# EAGLE board Small Mosfet (EAGLE 6.4)
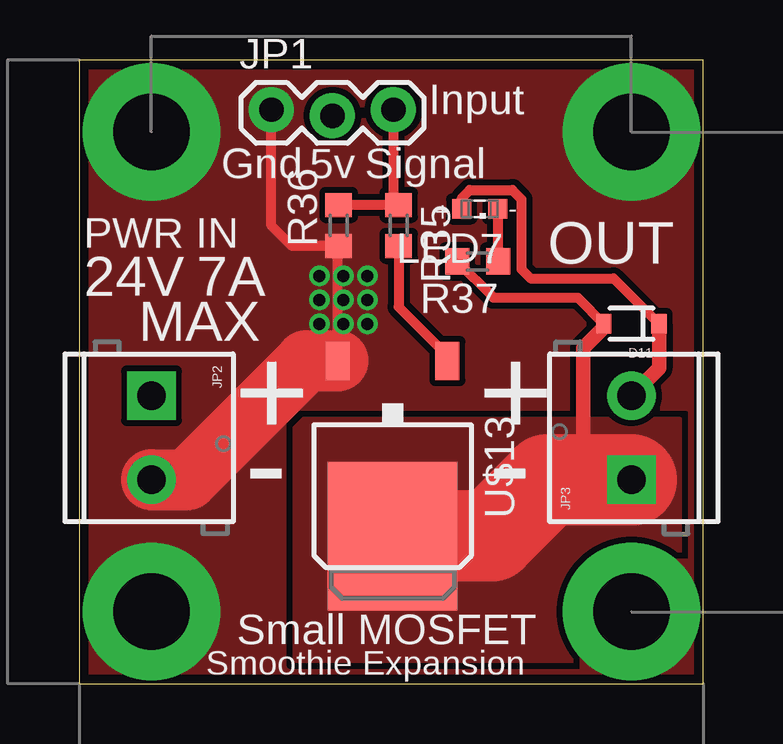
[diagram p0: board, top side]
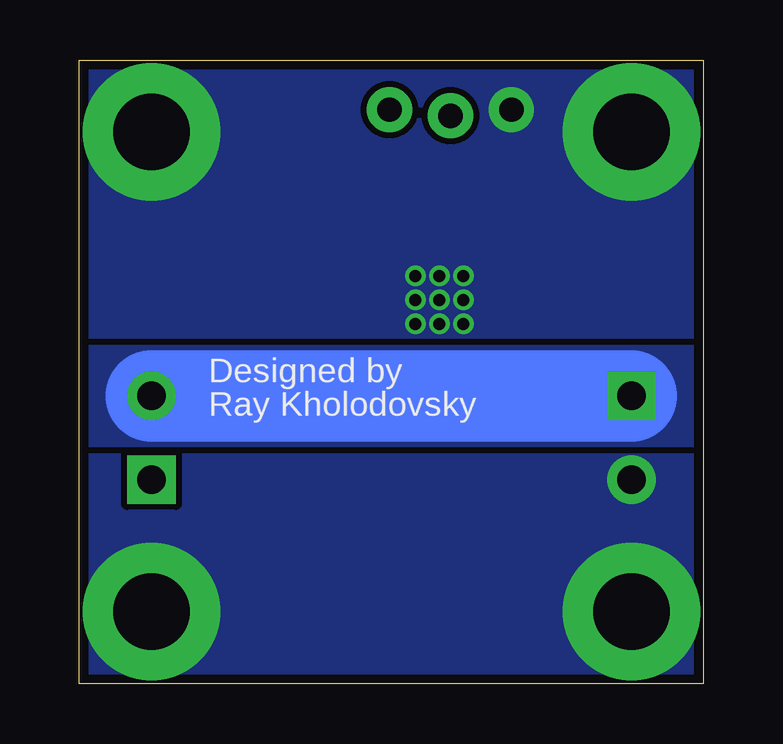
[diagram p1: board, bottom side, seen from below]

Size 26 x 26 mm. Coordinates in mm from the lower left corner, seen from the top.
Outline: 0,0 26,0 26,26 0,26 0,0
Copper layers (1*16): Top 0.0356mm / dielectric 1.5011mm / Bottom 0.0356mm
Design rules "LaenPCBOrder": minimum track width 6mil, minimum drill 13mil, track to track 6mil, track to pad 6mil, pad to pad 6mil, via to via 6mil, smd to smd 6mil, copper to edge 15mil, drill to drill 6mil, minimum pad ring 7mil, minimum via ring 7mil, stop-mask expansion 3mil, vias tented up to drill 0mil, thermal gap 10mil
Net classes: 5 3.3-Amp Class: width 1.27 mm

## Footprints (pad centres in the part's own frame; a part is rotated, then mirrored left to right if it is on the bottom)
SOD-323 = smd 0.63 x 0.83: A 1.15,0; C -1.15,0
1X03_LOCK = drill 1.016 pad 1.88: 1 0,0.127; 2 2.54,-0.127; 3 5.08,0.127
SCREWTERMINAL-3.5MM-2 = drill 1.2 pad 2.032 square: 1 0,0 | drill 1.2 pad 2.032: 2 3.5,0
SML0603 = smd 0.8 x 0.8: A 0.75,0; C -0.75,0
R0603 = smd 1 x 1.1: 1 -0.85,0; 2 0.85,0
D-PAK_TO252AA = smd 1 x 1.6: 1 -2.28,-4.8; 3 2.28,-4.8 | smd 5.4 x 6.2: 4 0,2.5

## Placement (x,y rotation side)
D11  1N4148  [SOD-323]  23,15 180 top
JP1  [1X03_LOCK]  8,23.8 0 top
JP2  [SCREWTERMINAL-3.5MM-2]  3,12 270 top
JP3  [SCREWTERMINAL-3.5MM-2]  23,8.5 90 top
LED7  LED  [SML0603]  16.68,19.79 180 top
R35  10r  [R0603]  13.3,19.1 270 top
R36  100k  [R0603]  10.8,19.1 90 top
R37  1.5k  [R0603]  16.59,17.6 180 top
U$13  IRLR024  [D-PAK_TO252AA]  13.05,8.65 180 top

## Library data of the parts
D11 = SparkFun-DiscreteSemi; PROD_ID: DIO-09646
JP1 = SparkFun-Connectors
JP2 JP3 = SparkFun-Connectors; PROD_ID: CONN-08399
LED7 = led
R35-R37 = resistor
U$13 = Cohesion_parts

## Nets
E1-CONTROL [3.3-Amp Class]: D11.A JP3.1 R37.2 U$13.4
FET-LOGIC-IN: JP1.3 R35.1 R36.2
GND: JP1.1 JP2.2 R36.1 U$13.3
HEATERVIN: D11.C JP2.1 JP3.2 LED7.A
N$28: R35.2 U$13.1
N$30: LED7.C R37.1
VCC: JP1.2

## Tracks (layer width: path | path; a pad name or v marks a point on that pad's centre or on a via)
E1-CONTROL
  Top 0.254: JP3.1 23.5,8.5 | 19,9.5 20.8,8.6 21,8.5
  Top 0.406: R37.2 17.25,16.09 20.76,16.09 D11.A
  Top 0.61: D11.A 21.85,14.85 21,14 21,8.8 20.8,8.6
  Top 3.81: JP3.1 21,8.5 19.5,8.5 17.15,6.15 U$13.4
  pour Top (isolate 0.254, no thermals): 25,11 9,11 9,1 25,1
FET-LOGIC-IN
  Top 0.254: 13.08,20.17 R35.1
  Top 0.406: R35.1 R36.2 | JP1.3 13.08,20.17
GND  (via drill 0.5, 3.2 pad 5.71)
  Top 0.254: 10.77,18.12 R36.1
  Top 0.406: U$13.3 10.77,18.12 | R36.1 8.85,18.25 8,19.1 JP1.1
  Top 2.54: JP2.2 4.5,8.5 9.45,13.45 U$13.3
  other vias: 3,3 23,3 23,23 3,23 10,15 11,15 12,15 12,16 11,16 10,16 10,17 11,17 12,17
  pour Top (isolate 0.254, rank 5, no thermals): 0,26 0,0 26,0 26,26
  pour Bottom (isolate 0.254, rank 5, no thermals): 0,26 0,0 26,0 26,26
HEATERVIN
  Top 0.406: LED7.A 15.93,20.25 16.26,20.57 18.03,20.57 18.41,20.19 18.41,17.27 18.8,16.89 22.26,16.89 D11.C
  Top 0.61: JP3.2 24.15,13.15 D11.C
  Bottom 3.81: JP2.1 JP3.2
  pour Bottom (isolate 0.254): 0,14 26,14 26,10 0,10
N$28
  Top 0.254: U$13.1 15.33,13.67
  Top 0.406: R35.2 13.3,15.7 15.33,13.67
N$30
  Top 0.254: R37.1
  Top 0.406: LED7.C R37.1

## Text on the board
tPlace: Input | Gnd | 5v | Signal | + | - | PWR IN | OUT | 24V | 7A | MAX | + | + | - | - | Small MOSFET | Smoothie Expansion
bPlace: Designed by | Ray Kholodovsky